# Allegro board SC-STM.brd
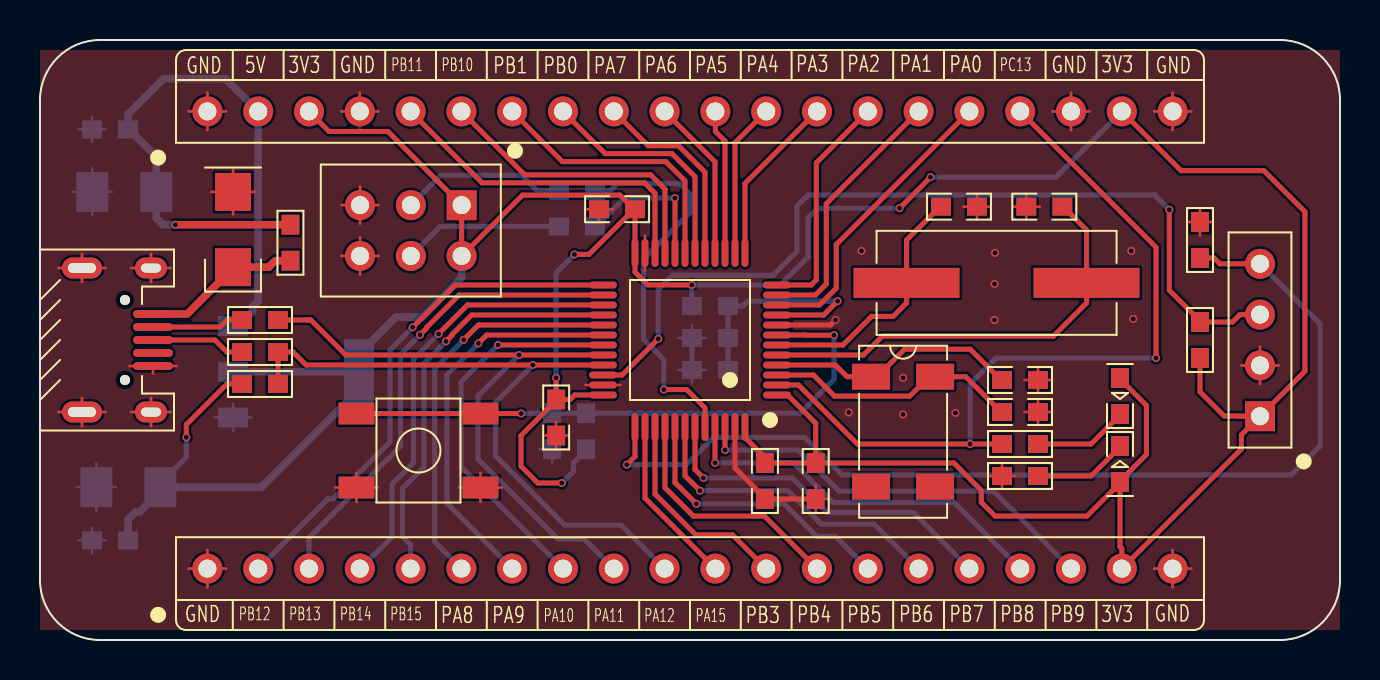
[diagram p0: board, top side]
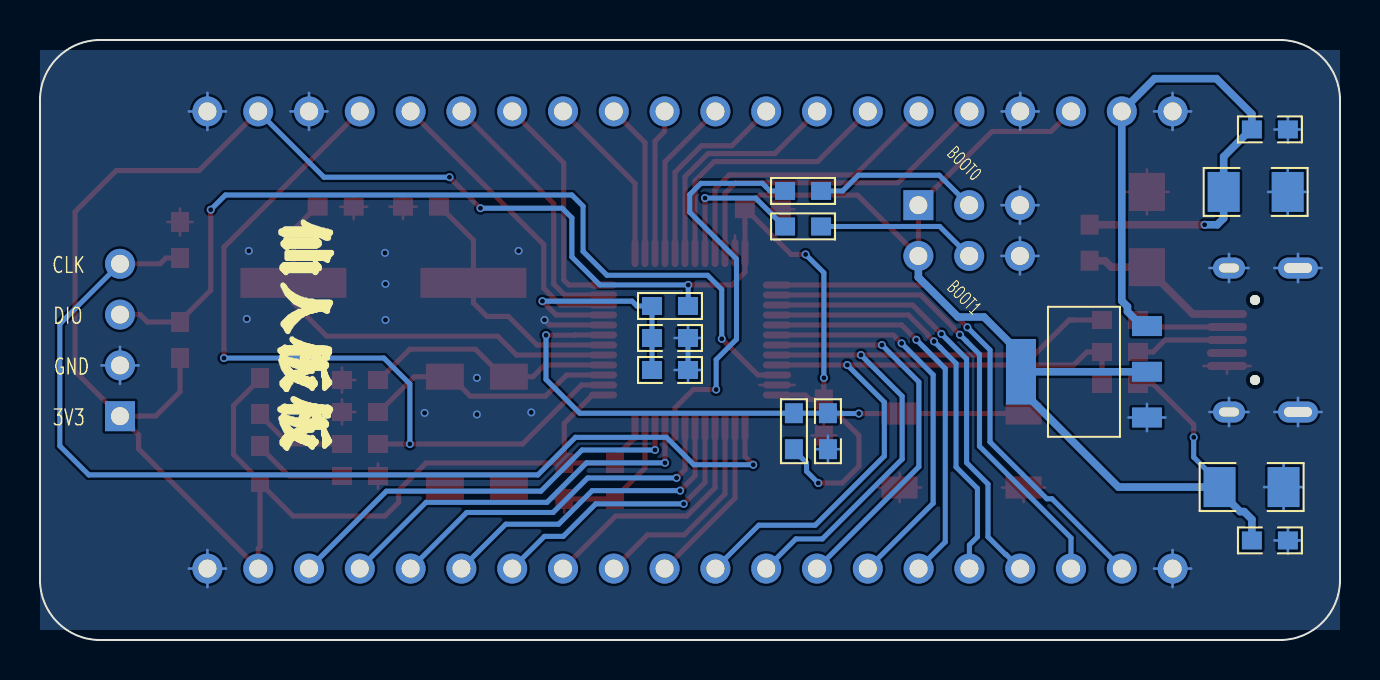
[diagram p1: board, bottom side, seen from below]

Outline 65 x 30 mm; copper layers: TOP, BOTTOM. Coordinates in mm from the lower left corner of the outline.
Outline path: 0,27 0,3 arc(0.88,0.88) 3,0 62,0 arc(64.12,0.88) 65,3 65,27 arc(64.12,29.12) 62,30 3,30 arc(0.88,29.12) 0,27

## Design rules (mm)
constraint set DEFAULT: min track width 0.127

## Placement (name value [footprint] x y rotation side)
C1  0.1uF  [C0603]  38.79 7.95 90 top
C2  0.1uF  [C0603]  28.85 21.54 0 top
C3  0.1uF  [C0603]  25.81 11.13 90 top
C4  0.1uF  [C0603]  36.25 7.95 90 top
C5  0.1uF  [C0603]  33.5 13.5 0 bottom
C6  0.1uF  [C0603]  33.5 15.1 0 bottom
C7  20pF  [C0603]  45.95 21.67 180 top
C8  20pF  [C0603]  50.22 21.67 0 top
C9  10pF  [C0603]  49 13 180 top
C10  10pF  [C0603]  49 11.4 180 top
C11  0.1uF  [C0603]  25.6 10.44 90 bottom
C12  10uF  [C1206]  4.22 22.4 0 bottom
C13  0.1uF  [C0603]  3.51 25.53 0 bottom
C14  10uF  [C1206]  4.42 7.65 0 bottom
C15  0.1uF  [C0603]  3.51 4.98 0 bottom
D1  SMAJ5.0CA  [DO214AC]  9.65 20.52 270 top
F1  FUSE500mA  [R0603]  12.52 19.86 270 top
J1  BOOT  [2X3PHEADER]  18.54 20.47 180 top
J2  4P_SWD  [1X4PHEADER]  61 15 90 top
J3  micro-USB  [MICROUSB_B]  2.1 15 180 top
J4  1x20pHeader  [1X20PHEADER]  32.5 26.43 0 top
J5  1x20pHeader  [1X20PHEADER]  32.5 3.57 0 top
K1  RESET  [SMD5R2X5R2MM]  18.92 9.47 0 top
L1  220Ohm  [R0603]  33.5 16.7 180 bottom
LED1  LED0603  [D0603]  54 8.8 90 top
LED2  LED0603  [D0603]  54 12.2 270 top
R1  10K  [R0603]  27.3 10.44 90 bottom
R2  10K  [R0603]  26.85 22.45 180 bottom
R3  10K  [R0603]  26.85 20.68 180 bottom
R4  10K  [R0603]  58 20 270 top
R5  10K  [R0603]  58 15 90 top
R6  10K  [R0603]  49 8.2 180 top
R7  10K  [R0603]  49 9.8 180 top
R8  22R  [R0603]  11 16 0 top
R9  22R  [R0603]  11 14.4 0 top
R10  1.5K  [R0603]  11 12.8 0 top
U1  STM32  [LQFP48]  32.5 15 90 top
U2  AMS1117  [SOT223]  12.8 13.41 90 bottom
Y1  8MHz  [49SMD]  47.83 17.86 180 top
Y2  32.768kHz  [MC306]  43.15 10.41 270 top

## Library data of the parts
C1-C6 C11 C13 C15 = CAP104
C7 C8 = CAP200
C9 C10 = CAP100
C12 C14 = CAP106
D1 = SMAJ5.0CA
F1 = FUSE500mA
J1 = 2x3pHeader
J2 = 1x4pHeader
J3 = microUSB
J4 J5 = 1x20pHeader
K1 = KEY5r2_5r2
L1 = BEAD
LED1 LED2 = LED0603
R1-R7 = RES103
R8 R9 = RES22R
R10 = RES152
U1 = STM32F103C8T6
U2 = AMS1117_3.3
Y1 = CRY8MHz
Y2 = CRY32768Hz

## Footprints (pads in the part's own frame, mm; a bottom-side part is the same pattern mirrored in y, then rotated)
1X4PHEADER
  rect 1.5x1.5 hole 0.9: 1(-3.81,0)
  round 1.5 hole 0.9: 2(-1.27,0) 3(1.27,0) 4(3.81,0)
1X20PHEADER
  round 1.5 hole 0.9: 1(-24.13,0) 2(-21.59,0) 3(-19.05,0) 4(-16.51,0) 5(-13.97,0) 6(-11.43,0) 7(-8.89,0) 8(-6.35,0) 9(-3.81,0) 10(-1.27,0) 11(1.27,0) 12(3.81,0) 13(6.35,0) 14(8.89,0) 15(11.43,0) 16(13.97,0) 17(16.51,0) 18(19.05,0) 19(21.59,0) 20(24.13,0)
2X3PHEADER
  rect 1.5x1.5 hole 0.9: 1(-2.54,-1.27)
  round 1.5 hole 0.9: 2(-2.54,1.27) 3(0,-1.27) 4(0,1.27) 5(2.54,-1.27) 6(2.54,1.27)
49SMD
  rect 5.3x1.5 smd: 1(-4.5,0) 2(4.5,0)
C0603
  rect 1x0.9 smd: 1(-0.9,0) 2(0.9,0)
C1206
  rect 1.6x2 smd: 1(-1.6,0) 2(1.6,0)
D0603
  rect 1x0.9 smd: 1(-0.9,0) 2(0.9,0)
DO214AC
  rect 1.9x1.8 smd: 1(-1.88,0) 2(1.88,0)
LQFP48
  oval 0.35x1.4 smd: 1(-2.75,-4.35) 2(-2.25,-4.35) 3(-1.75,-4.35) 4(-1.25,-4.35) 5(-0.75,-4.35) 6(-0.25,-4.35) 7(0.25,-4.35) 8(0.75,-4.35) 9(1.25,-4.35) 10(1.75,-4.35) 11(2.25,-4.35) 12(2.75,-4.35) 25(2.75,4.35) 26(2.25,4.35) 27(1.75,4.35) 28(1.25,4.35) 29(0.75,4.35) 30(0.25,4.35) 31(-0.25,4.35) 32(-0.75,4.35) 33(-1.25,4.35) 34(-1.75,4.35) 35(-2.25,4.35) 36(-2.75,4.35)
  oval 1.4x0.35 smd: 13(4.35,-2.75) 14(4.35,-2.25) 15(4.35,-1.75) 16(4.35,-1.25) 17(4.35,-0.75) 18(4.35,-0.25) 19(4.35,0.25) 20(4.35,0.75) 21(4.35,1.25) 22(4.35,1.75) 23(4.35,2.25) 24(4.35,2.75) 37(-4.35,2.75) 38(-4.35,2.25) 39(-4.35,1.75) 40(-4.35,1.25) 41(-4.35,0.75) 42(-4.35,0.25) 43(-4.35,-0.25) 44(-4.35,-0.75) 45(-4.35,-1.25) 46(-4.35,-1.75) 47(-4.35,-2.25) 48(-4.35,-2.75)
MC306
  rect 1.3x1.9 smd: 1(-2.75,-1.6) 2(2.75,-1.6) 3(2.75,1.6) 4(-2.75,1.6)
MICROUSB_B
  round 0.5 hole 0.5 unplated: (-2.15,2) (-2.15,-2)
  oval 2x0.4 smd: 1(-3.55,-1.3) 2(-3.55,-0.65) 3(-3.55,0) 4(-3.55,0.65) 5(-3.55,1.3)
  oval 1.6x1.05 hole 1x0.45: 6(-3.45,3.6) 8(-3.45,-3.6)
  oval 2x1.05 hole 1.4x0.5: 7(0,3.6) 9(0,-3.6)
R0603
  rect 1x0.9 smd: 1(-0.9,0) 2(0.9,0)
SMD5R2X5R2MM
  rect 1.8x1.1 smd: 1(3.1,-1.85) 2(-3.1,-1.85) 3(3.1,1.85) 4(-3.1,1.85)
SOT223
  rect 1x1.5 smd: 1(-2.286,-3.15) 2(0,-3.15) 3(2.286,-3.15)
  rect 3.28x1.5 smd: 4(0,3.15)

## Nets
3V3: C1.2 C2.2 C3.2 C4.2 C14.2 C15.2 J1.1 J1.2(VCC#2) J2.1 J4.3 J4.19 J5.19 L1.2 LED1.1 LED2.1 R1.1 R5.1 R10.1 U1.1 U1.24 U1.36 U1.48 U2.2 U2.4
5V: C12.2 C13.2 F1.1 J4.2 U2.3
5V_USB: D1.2 F1.2 J3.1(VBUS)
GND: C1.1 C2.1 C3.1 C4.1 C5.1 C6.1 C7.1 C8.1 C9.1 C10.1 C11.1 C12.1 C13.1 C14.1 C15.1 D1.1 J1.5 J1.6 J2.2 J3.5 J3.6 J3.7 J3.8 J3.9 J4.1 J4.4 J4.18 J4.20 J5.1 J5.20 K1.1 K1.2 R4.1 R6.2 U1.8 U1.23 U1.35 U1.47(VSS_3) U2.1(VSS)
BOOT0: R2.1 U1.44
BOOT1: R3.1 U1.20
NRST: C11.2 K1.3 K1.4 R1.2 U1.7
OSC32_IN: C10.2 U1.3 Y2.4(OUT)
OSC32_OUT: C9.2 U1.4 Y2.1
OSC_IN: C8.2 U1.5 Y1.1
OSC_OUT: C7.2 U1.6 Y1.2
PA0: J4.16 U1.10
PA1: J4.15 U1.11
PA2: J4.14 U1.12
PA3: J4.13 U1.13
PA4: J4.12 U1.14
PA5: J4.11 U1.15
PA6: J4.10 U1.16
PA7: J4.9 U1.17
PA8: J5.6 U1.29
PA9: J5.7 U1.30
PA10: J5.8 U1.31
PA11: J5.9 R8.2 U1.32
PA12: J5.10 R9.2 R10.2 U1.33
PA15: J5.11 U1.38
PB0: J4.8 U1.18
PB1: J4.7 U1.19
PB3: J5.12 U1.39
PB4: J5.13 U1.40
PB5: J5.14 U1.41
PB6: J5.15 U1.42
PB7: J5.16 U1.43
PB8: J5.17 U1.45
PB9: J5.18 U1.46
PB10: J4.6 U1.21
PB11: J4.5 U1.22
PB12: J5.2 U1.25
PB13: J5.3 U1.26
PB14: J5.4 U1.27
PB15: J5.5 U1.28
PC13: J4.17 R7.2 U1.2
SWCLK: J2.4 R4.2 U1.37
SWDIO: J2.3(SWDIO) R5.2 U1.34
N01852: C5.2 C6.2 L1.1 U1.9
N05855: J1.4 R3.2
N05862: J1.3 R2.2
N08930: LED1.2 R6.1
N08934: LED2.2 R7.1
N46213: J3.2 R8.1
N46225: J3.3 R9.1

Pads without a net: J3 4; Y2 2 3

## Via types
v1: diameter 0.4, hole 0.25, TOP to BOTTOM, 43 vias

## Routing (per net, layer and track width the routed paths; a pad name or vN(x,y) marks a point on that pad's centre or on a via; arc(x,y) is an arc through that point)
3V3: length 192.4
  TOP w0.254: 54,7.85 54,4.66 54.09,4.57 J5.19 60.07,9.55 60.07,10.26 J2.1 ; 54,7.85 52.35,6.2 47.75,6.2 47.07,6.88 47.07,7.48 45.69,8.85 C1.2 ; 54,7.85 LED1.1 54,7.95 55.32,9.27 55.32,11.73 54,13.05 LED2.1 ; 29.7,21.54 27.44,19.28 v1(26.72,19.28) ; 29.7,21.54 C2.2 29.75,20.84 29.75,20.83 U1.24 29.75,18.4 30.39,17.75 v1(32.59,17.75) ; 29.7,21.54 29,22.24 24.12,22.24 J1.2 J1.1 17.4,25.43 14.45,25.43 J4.3 ; v1(42.98,21.59) v1(44.53,23.14) ; U1.36 26.74,12.25 26.51,12.03 C3.2 ; C1.2 C4.2 36.25,9.13 35.25,10.12 U1.48 ; C1.2 38.79,10.84 37.38,12.25 U1.1 ; v1(7.32,10.13) 7.32,10.77 9.35,12.8 R10.1 ; J2.1 63.25,13.44 63.25,21.41 61.19,23.47 57.05,23.47 J4.19 ; J2.1 60,11.19 59.98,11.2 59.21,11.2 58,12.41 R5.1 ; C3.2 v1(25.81,13.11) ; C3.2 25.81,11.98 24.05,10.22 24.05,8.69 24.89,7.85 v1(26.09,7.85)
  BOTTOM w0.254: v1(26.09,7.85) 26.68,8.44 26.68,8.86 27.3,9.49 R1.1 ; v1(25.81,13.11) 25.81,18.36 v1(26.72,19.28) ; J4.19 50.8,23.14 v1(44.53,23.14) ; L1.2 32.59,16.71 v1(32.59,17.75) 37.01,17.75 38.4,19.15 38.4,21.11 38.89,21.59 v1(42.98,21.59) ; v1(7.32,10.13) 7.32,9.14 6.02,7.85 C14.2
  BOTTOM w0.381: C15.2 4.41,6.03 4.79,6.42 5,6.42 6.02,7.45 C14.2 11.08,7.65 15.95,12.52 U2.4 ; U2.4 U2.2 ; U2.4 15.95,14.3 17.8,16.15 19.1,16.15 21.08,18.13 J1.2
5V: length 32
  TOP w0.381: F1.1 v1(6.77,20.76)
  BOTTOM w0.381: v1(6.77,20.76) 6.14,20.76 5.82,21.09 C12.2 5.82,24.17 4.46,25.53 C13.2 4.41,26.29 6.18,28.07 9.27,28.07 J4.2 10.91,16.96 10.63,16.67 10.63,16.42 9.9,15.7 U2.3
5V_USB: length 8
  TOP w0.381: J3.1 7.36,16.3 9.65,18.59 D1.2 11.44,18.64 11.75,18.96 F1.2
GND: length 169.6
  TOP w0.127: J3.7 3.28,11.4 ; J3.7 2.1,12.1 ; J3.7 2.1,10.7 ; J3.7 0.92,11.4 ; J2.2 61.93,13.73 ; J2.2 60.07,13.73 ; J2.2 61,14.66 ; J2.2 61,12.8 ; 15.82,7.62 15.82,8.35 ; 15.82,7.62 14.74,7.62 ; 15.82,7.62 16.9,7.62 ; 15.82,7.62 15.82,6.9 ; J4.1 9.3,26.43 ; J4.1 7.44,26.43 ; J4.1 8.37,25.5 ; J4.1 8.37,27.36 ; 49.32,21.04 C8.1 ; C8.1 49.99,21.67 ; C8.1 49.32,22.29 ; C8.1 48.64,21.67 ; C1.1 39.41,7.05 ; C1.1 38.79,7.73 ; C1.1 38.79,6.37 ; 49.22,13 C9.1 ; C9.1 49.9,12.37 ; C9.1 49.9,13.63 ; C9.1 50.58,13 ; 55.7,3.57 J5.20 ; J5.20 56.63,4.5 ; J5.20 56.63,2.64 ; J5.20 57.56,3.57 ; D1.1 9.65,23.53 ; D1.1 10.73,22.4 ; D1.1 9.65,21.28 ; D1.1 8.57,22.4 ; J1.6 16.93,19.2 ; J1.6 15.07,19.2 ; J1.6 16,20.13 ; J1.6 16,18.27 ; 0.92,18.6 J3.9 ; J3.9 2.1,19.3 ; J3.9 3.28,18.6 ; J3.9 2.1,17.9 ; 51.55,25.5 J4.18 ; J4.18 51.55,27.36 ; J4.18 52.48,26.43 ; J4.18 50.62,26.43 ; 58,20.22 R4.1 ; R4.1 58,21.58 ; R4.1 57.37,20.9 ; R4.1 58.63,20.9 ; R6.2 48.78,8.2 ; R6.2 47.42,8.2 ; R6.2 48.1,8.83 ; R6.2 48.1,7.57 ; 46.17,21.67 C7.1 ; C7.1 46.85,21.04 ; C7.1 47.53,21.67 ; C7.1 46.85,22.29 ; J3.6 6.53,11.4 ; J3.6 5.55,12.1 ; J3.6 4.57,11.4 ; J3.6 5.55,10.7 ; 5.65,13.32 J3.5 ; J3.5 4.47,13.7 ; J3.5 6.83,13.7 ; J5.1 9.3,3.57 ; J5.1 8.37,2.64 ; J5.1 7.44,3.57 ; J5.1 8.37,4.5 ; J1.5 16,22.67 ; J1.5 16.93,21.74 ; J1.5 15.07,21.74 ; J1.5 16,20.81 ; J4.4 15.99,27.36 ; J4.4 16.92,26.43 ; J4.4 15.06,26.43 ; J4.20 57.56,26.43 ; J4.20 56.63,27.36 ; J4.20 56.63,25.5 ; J4.20 55.7,26.43 ; 27.27,12.75 U1.35 29.03,12.75 ; 25.81,9.55 C3.1 ; C3.1 25.18,10.23 ; C3.1 26.43,10.23 ; C3.1 25.81,10.9 ; C2.1 28.63,21.54 ; C2.1 27.95,20.91 ; C2.1 27.28,21.54 ; J3.8 5.55,19.3 ; J3.8 4.57,18.6 ; J3.8 5.55,17.9 ; J3.8 6.53,18.6 ; 49.9,10.77 C10.1 ; C10.1 49.22,11.4 ; C10.1 49.9,12.03 ; C10.1 50.58,11.4 ; K1.1 22.02,8.35 ; K1.1 20.94,7.62 ; K1.1 23.1,7.62 ; K1.1 22.02,6.9 ; 30.25,20.23 U1.23 30.25,18.47
  TOP w0.254: C1.1 C4.1 36.25,7.1 34.75,8.6 U1.47 ; v1(39.78,16) 39.52,15.75 U1.8
  BOTTOM w0.127: J4.4 15.99,27.36 ; J4.4 15.99,25.5 ; J4.4 15.06,26.43 ; J4.4 16.92,26.43 ; J3.8 6.53,18.6 ; J3.8 5.55,17.9 ; J3.8 4.57,18.6 ; J3.8 5.55,19.3 ; 55.7,26.43 J4.20 ; J4.20 56.63,27.36 ; J4.20 56.63,25.5 ; J4.20 57.56,26.43 ; J5.1 9.3,3.57 ; J5.1 8.37,2.64 ; J5.1 7.44,3.57 ; J5.1 8.37,4.5 ; 2.62,21.22 C12.1 ; C12.1 3.59,22.4 ; C12.1 2.62,23.58 ; C12.1 1.64,22.4 ; C6.1 33.28,15.1 ; C6.1 31.92,15.1 ; C6.1 32.6,15.73 ; J1.5 16.93,21.74 ; J1.5 16,20.81 ; J1.5 15.07,21.74 ; J1.5 16,22.67 ; J3.6 5.55,12.1 ; J3.6 4.57,11.4 ; J3.6 6.53,11.4 ; J3.6 5.55,10.7 ; 31.92,13.5 C5.1 ; C5.1 32.6,12.87 ; C5.1 33.28,13.5 ; 1.93,4.98 C15.1 ; C15.1 2.61,4.35 ; C15.1 3.28,4.98 ; C15.1 2.61,5.61 ; J3.7 2.1,12.1 ; J3.7 2.1,10.7 ; J3.7 3.28,11.4 ; J3.7 0.92,11.4 ; J5.20 56.63,4.5 ; J5.20 57.56,3.57 ; J5.20 55.7,3.57 ; J5.20 56.63,2.64 ; J4.1 8.37,27.36 ; J4.1 9.3,26.43 ; J4.1 8.37,25.5 ; J4.1 7.44,26.43 ; C11.1 26.23,9.54 ; C11.1 25.6,10.22 ; C11.1 24.98,9.54 ; C11.1 25.6,8.86 ; C13.1 2.61,26.16 ; C13.1 2.61,24.9 ; C13.1 3.28,25.53 ; C13.1 1.93,25.53 ; J3.9 2.1,19.3 ; J3.9 3.28,18.6 ; J3.9 2.1,17.9 ; J3.9 0.92,18.6 ; C14.1 2.82,8.82 ; C14.1 2.82,6.47 ; C14.1 3.8,7.65 ; C14.1 1.84,7.65 ; J1.6 16,20.13 ; J1.6 16.93,19.2 ; J1.6 15.07,19.2 ; J1.6 16,18.27 ; 61,12.8 J2.2 ; J2.2 61,14.66 ; J2.2 61.93,13.73 ; J2.2 60.07,13.73 ; 9.65,10.45 U2.1 ; U2.1 10.58,11.13 ; U2.1 8.72,11.13 ; U2.1 9.65,11.8 ; J4.18 52.48,26.43 ; J4.18 50.62,26.43 ; J4.18 51.55,25.5 ; J4.18 51.55,27.36
  BOTTOM w0.254: C5.1 C6.1
  vias: v1(40.44,11.38) v1(41.07,19.46) v1(43.15,13.11) v1(43.15,11.28) v1(45.77,11.35) v1(47.73,17.81) v1(47.73,16) v1(47.75,19.35) v1(54.56,19.46) v1(54.66,16.05)
BOOT0: length 19.7
  TOP w0.254: v1(31.19,12.52) 32.33,12.52 33.25,11.6 U1.44
  BOTTOM w0.254: R2.1 28.5,22.45 28.88,22.83 31.95,22.83 32.51,22.28 32.51,21.39 30.18,19.05 30.18,15.04 31.19,14.02 v1(31.19,12.52)
BOOT1: length 7.3
  TOP w0.254: U1.20 v1(31.75,22.1)
  BOTTOM w0.254: R3.1 27.8,20.68 29.22,22.1 v1(31.75,22.1)
NRST: length 29.6
  TOP w0.254: v1(24.06,11.32) K1.3 15.82,11.32 ; U1.7 38.25,15.25 38.26,15.24 v1(39.7,15.24)
  BOTTOM w0.254: v1(24.06,11.32) 24.88,11.32 24.9,11.34 C11.2 R1.2 38.01,11.34 39.7,13.03 v1(39.7,15.24)
OSC32_IN: length 12.8
  TOP w0.254: U1.3 38.67,13.25 39.73,12.19 43.48,12.19 44.45,13.16 Y2.4 46.29,13.16 48.05,11.4 C10.2
OSC32_OUT: length 12.7
  TOP w0.254: U1.4 39.76,13.75 40.35,13.16 Y2.1 41.85,13.16 43.23,14.54 46.51,14.54 48.05,13 C9.2
OSC_IN: length 21.9
  TOP w0.254: U1.5 41.17,14.25 42.11,15.19 50.67,15.19 52.33,16.85 Y1.1 52.33,20.5 51.17,21.67 C8.2
OSC_OUT: length 12.9
  TOP w0.254: U1.6 40.15,14.75 41.58,16.18 42.66,16.18 43.33,16.85 Y1.2 43.33,20 45,21.67 C7.2
PA0: length 14.9
  TOP w0.254: J4.16 39.81,19.77 39.81,17.59 38.98,16.75 U1.10
PA1: length 13.2
  TOP w0.254: U1.11 38.77,17.25 39.31,17.8 39.31,21.81 J4.15
PA2: length 11.6
  TOP w0.254: J4.14 38.81,23.85 38.81,18 38.56,17.75 U1.12
PA3: length 8.6
  TOP w0.254: U1.13 35.25,22.83 J4.13
PA4: length 7.7
  TOP w0.254: U1.14 34.75,24.87 J4.12
PA5: length 7.3
  TOP w0.254: U1.15 34.25,24.95 33.77,25.43 J4.11
PA6: length 8.1
  TOP w0.254: U1.16 33.75,23.91 J4.10
PA7: length 9.9
  TOP w0.254: J4.9 30.41,24.71 31.93,24.71 33.25,23.39 U1.17
PA8: length 19.9
  TOP w0.254: v1(21.18,15.01) 21.92,15.75 U1.29
  BOTTOM w0.254: J5.6 19.74,4.9 19.74,13.56 v1(21.18,15.01)
PA9: length 19.7
  TOP w0.254: U1.30 22.34,15.25 v1(21.92,14.83)
  BOTTOM w0.254: J5.7 20.35,6.83 20.35,13.26 v1(21.92,14.83)
PA10: length 19.3
  TOP w0.254: U1.31 v1(22.9,14.75)
  BOTTOM w0.254: J5.8 21.06,8.66 21.06,12.9 v1(22.9,14.75)
PA11: length 32.1
  TOP w0.254: U1.32 v1(23.95,14.25) 15.29,14.25 13.54,16 13.36,16 13.36,16 R8.2
  BOTTOM w0.254: v1(23.95,14.25) 21.89,12.19 21.89,9.04 25.88,5.05 27.21,5.05 J5.9
PA12: length 34.2
  TOP w0.254: U1.33 v1(24.64,13.75) 13.3,13.75 12.65,14.4 R9.2 R10.2
  BOTTOM w0.254: J5.10 29.06,5.74 26.24,5.74 22.78,9.19 22.78,11.9 v1(24.64,13.75)
PA15: length 8.5
  TOP w0.254: J5.11 30.25,7.09 U1.38
PB0: length 11.8
  TOP w0.254: U1.18 32.75,23.16 31.6,24.32 28.26,24.32 J4.8
PB1: length 13.7
  TOP w0.254: J4.7 26.12,23.92 31.29,23.92 32.25,22.96 U1.19
PB3: length 10.5
  TOP w0.254: J5.12 34.62,5.26 32.79,5.26 30.75,7.3 U1.39
PB4: length 12.3
  TOP w0.254: J5.13 36.22,6.2 32.66,6.2 31.25,7.61 U1.40
PB5: length 14.2
  TOP w0.254: U1.41 31.75,7.87 v1(32.82,6.81)
  BOTTOM w0.254: v1(32.82,6.81) 37.21,6.81 38.84,5.18 39.78,5.18 J5.14
PB6: length 16
  TOP w0.254: v1(32.99,7.47) 32.25,8.21 U1.42
  BOTTOM w0.254: v1(32.99,7.47) 37.39,7.47 39.07,5.79 41.71,5.79 J5.15
PB7: length 17.9
  TOP w0.254: v1(33.17,8.1) 32.75,8.53 U1.43
  BOTTOM w0.254: J5.16 43.66,6.38 39.34,6.38 37.62,8.1 v1(33.17,8.1)
PB8: length 19.2
  TOP w0.254: U1.45 v1(33.75,8.86)
  BOTTOM w0.254: v1(33.75,8.86) 37.67,8.86 39.65,6.88 45.7,6.88 J5.17
PB9: length 20.9
  TOP w0.254: U1.46 v1(34.25,9.5)
  BOTTOM w0.254: v1(34.25,9.5) 37.9,9.5 39.95,7.44 47.68,7.44 J5.18
PB10: length 15
  TOP w0.254: J4.6 24.24,23.26 30.53,23.26 31.25,22.54 U1.21
PB11: length 16.9
  TOP w0.254: U1.22 30.75,22.34 30.23,22.86 22.1,22.86 J4.5
PB12: length 25.8
  TOP w0.254: v1(18.63,15.63) 20.75,17.75 U1.25
  BOTTOM w0.254: J5.2 14.4,7.06 14.66,7.06 17.5,9.91 17.5,14.5 v1(18.63,15.63)
PB13: length 24
  TOP w0.254: v1(19,15.26) 19.32,15.58 19.32,15.62 20.95,17.25 U1.26
  BOTTOM w0.254: J5.3 13.45,5.11 18.03,9.69 18.03,14.29 18.68,14.94 v1(19,15.26)
PB14: length 22.2
  TOP w0.254: U1.27 21.37,16.75 v1(19.93,15.3)
  BOTTOM w0.254: v1(19.93,15.3) 18.67,14.05 18.67,8.86 17.6,7.8 17.6,5.16 16.73,4.28 16.7,4.28 J5.4
PB15: length 20.8
  TOP w0.254: v1(20.3,14.93) 20.62,15.25 20.62,15.29 21.58,16.25 U1.28
  BOTTOM w0.254: v1(20.3,14.93) 19.98,14.61 19.2,13.83 19.2,8.65 18.13,7.58 18.13,5.16 18.53,4.76 J5.5
PC13: length 40.5
  TOP w0.254: v1(55.8,14.1) 55.8,19.64 J4.17 ; R7.2 v1(46.51,9.8) 40.87,9.8 37.92,12.75 U1.2
  BOTTOM w0.254: v1(46.51,9.8) 46.51,12.8 47.8,14.1 v1(55.8,14.1)
SWCLK: length 52.2
  TOP w0.254: U1.37 29.75,9.18 v1(29.34,8.76) ; 58,19.15 R4.2 58.7,19.1 58.99,18.81 J2.4
  BOTTOM w0.254: v1(29.34,8.76) 32.31,8.76 33.68,10.13 38.23,10.13 40.11,8.26 62.56,8.26 64.01,9.7 64.01,15.8 J2.4
SWDIO: length 44.5
  TOP w0.254: v1(30.91,15.06) 29.1,13.25 U1.34 ; v1(56.46,21.51) 56.46,17.49 58,15.95 R5.2 59.63,15.9 60,16.27 J2.3
  BOTTOM w0.254: v1(56.46,21.51) 55.73,22.25 38.4,22.25 37.85,21.69 37.85,19.43 36.65,18.24 31.62,18.24 30.91,17.53 v1(30.91,15.06)
N01852: length 12.1
  TOP w0.254: v1(39.88,16.94) 39.19,16.25 U1.9
  BOTTOM w0.254: C5.2 C6.2 L1.1 35.15,16.7 35.4,16.94 v1(39.88,16.94)
N05855: length 8
  BOTTOM w0.254: R3.2 20.02,20.68 J1.4
N05862: length 8.4
  BOTTOM w0.254: R2.2 24.87,22.45 24.08,23.24 20.04,23.24 J1.3
N08930: length 4.8
  TOP w0.254: LED1.2 54,9.65 52.55,8.2 R6.1
N08934: length 4.8
  TOP w0.254: LED2.2 54,11.25 52.55,9.8 R7.1
N46213: length 4.6
  TOP w0.254: J3.2 9,15.65 9.35,16 R8.1
N46225: length 4.7
  TOP w0.254: J3.3 8.75,15 9.35,14.4 R9.1

## Copper pours and planes (outline as drawn; the poured copper is in the pictures)
GND on TOP: 0,0.5 0,29.5 65,29.5 65,0.5 ; 1 cut-out
GND on BOTTOM: 0,0.5 0,29.5 65,29.5 65,0.5 ; 4 cut-outs

## Text on the board
Ref Des/Silkscreen Bottom: BOOT0 | BOOT1 | GND | DIO | 3V3 | CLK
Ref Des/Silkscreen Top: PB12 | PB13 | PB14 | PB15 | PB11 | PB10 | PA10 | PA11 | PA12 | PA15 | PC13 | GND | 5V | 3V3 | PA8 | PA9 | PB1 | PB0 | PA7 | PA6 | PA5 | PB3 | PA4 | PA3 | PB4 | PA2 | PB5 | PB6 | PA1 | PA0 | PB7 | PB8 | PB9
NCLEGEND-1-2: FIGURE | FINISHED_SIZE | 0.25 | 0.8999 | 0.5001 | 1.0x0.4501 | 1.4x0.5001 | DRILL CHART: TOP to BOTTOM | ALL UNITS ARE IN MILLIMETERS | PLATED | NON-PLATED | QTY | 43 | 50 | 2
